# Altium PCB BH1750_VE6070-RS485 copy.pcbdoc
Units mil, origin at the board's own origin, x right, y up, seen from the top; angles counter-clockwise.
Board outline 4205 x 3775 mil, 2 copper layers (Top Layer, Bottom Layer); 44 components, 46 nets, 133 pads, 69 vias.
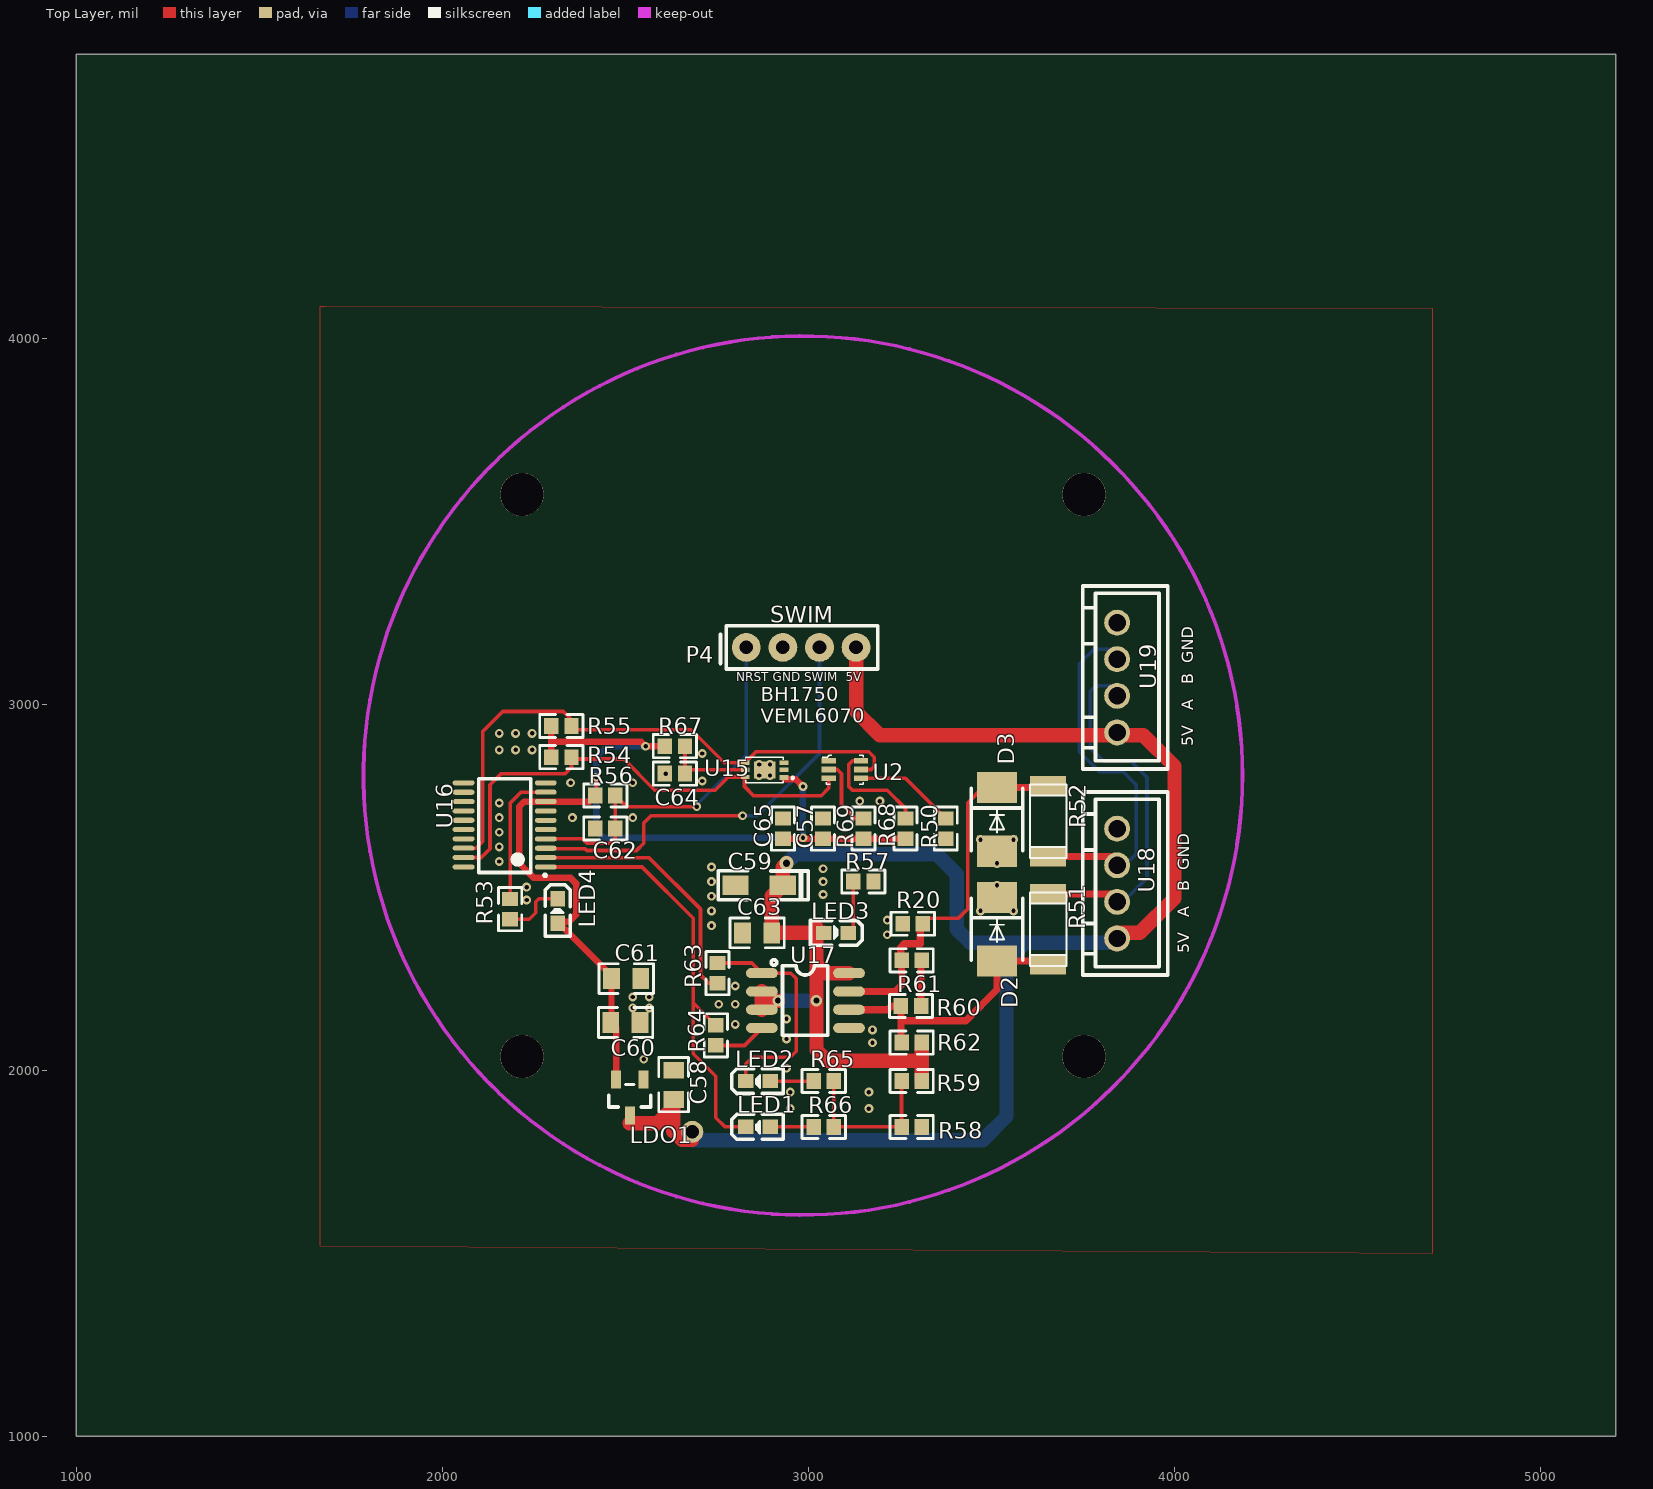
[diagram p0: Top Layer view]
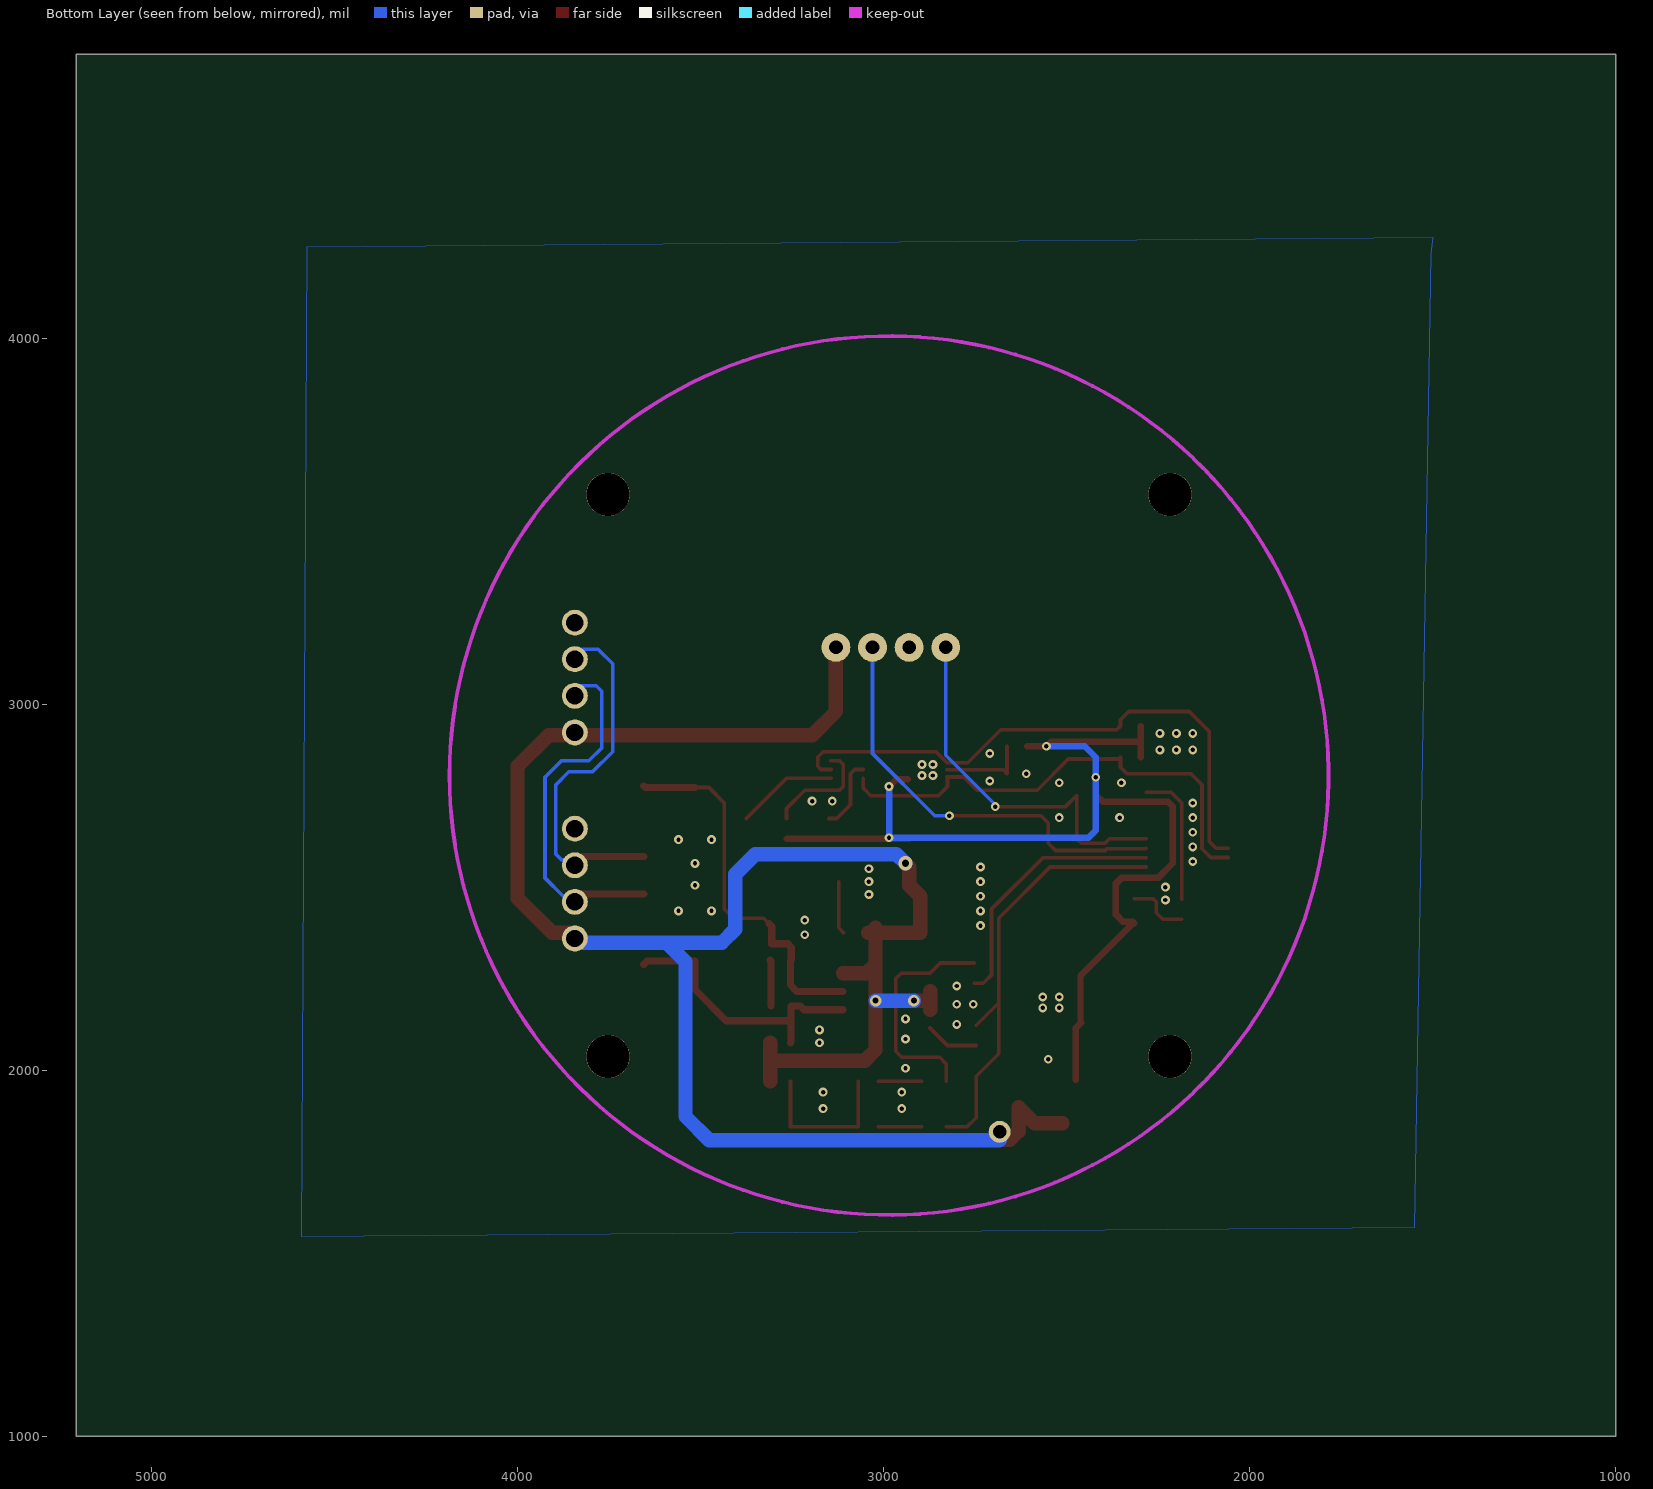
[diagram p1: Bottom Layer view, seen from below]

## Layer stack, top to bottom
Top Layer: signal copper (thickness not stored)
Dielectric: dielectric 12.6, FR-4, Dk 4.8
Bottom Layer: signal copper (thickness not stored)

## Board outline
5205,1000 1000,1000 1000,4775 5205,4775

## Components (designator, comment, footprint, x,y, rotation, side; value= is the part's Value field where it differs from the comment)
C57 "0.1uF" 0603 3040,2660 r90 top
C58 "100nF" 0805 2631.84,1960.1 r270 top
C59 "10uF" CASE-A_3216 2865,2505 r0 top
C60 "1uF" 0805 2500,2130 r180 top
C61 "100nF" 0805 2501.84,2250.1 r180 top
C62 "100nF" 0603 2445,2660 r0 top
C63 "1uF" 0805 2860,2375 r0 top
C64 "0.1uF" 0603 2635,2810 r180 top
C65 "10uF" 0603 2930,2660 r90 top
D2 "SMBJ6.8CA" SMB(DO-214AA) 3515,2385 r90 top
D3 "SMBJ6.8CA" SMB(DO-214AA) 3515,2685 r90 top
LDO1 "SC662K-3.3V" SOT-23(SOT-23-3) 2511.84,1925.1 r180 top
LED1 "KT-0603R" LED-0603 2861.84,1845.1 r0 top
LED2 "19-217/BHC-ZL1M2RY/3T" LED-0603 2861.84,1970.1 r0 top
LED3 "19-217/GHC-YR1S2/3T" LED-0603 3075,2375 r180 top
LED4 "19-213/Y2C-CQ2R2L/3T(CY)" LED-0603 2315,2435 r270 top
P4 "2.54mm/4p" "4P 2.54" 3130,3155 r180 top
R20 "4.7K" 0603 3285,2400 r0 top
R50 "270K" 0603 3375,2660 r270 top
R51 "10" 2010 3655,2385 r270 top
R52 "10" 2010 3655,2680 r90 top
R53 "1K" 0603 2185,2440 r270 top
R54 "4.7K" 0603 2325,2855 r180 top
R55 "4.7K" 0603 2325,2940 r180 top
R56 "1K" 0603 2445,2750 r180 top
R57 "1K" 0603 3150,2515 r180 top
R58 "2K" 0603 3281.84,1845.1 r0 top
R59 "470" 0603 3281.84,1970.1 r0 top
R60 "120" 0603 3280,2175 r180 top
R61 "NC" 0603 3281.84,2300.1 r180 top
R62 "4.7K" 0603 3281.84,2075.1 r180 top
R63 "22" 0603 2751.84,2265.1 r90 top
R64 "22" 0603 2746.84,2095.1 r270 top
R65 "4.7K" 0603 3041.84,1970.1 r180 top
R66 "4.7K" 0603 3041.84,1845.1 r180 top
R67 "1K" 0603 2635,2885 r0 top
R68 "10r" 0603 3265,2660 r270 top
R69 "10K" 0603 3150,2660 r270 top
U2 "VEML6070" 6SMD_MODULE 3055,2845 r0 top
U15 "BH1750FVI-TR" WSOF6I-7_L1.8-W2.6-H0.75-PITCH0.5-(EP)-BL 2880,2820 r90 top
U16 "STM8L051F3_JX" TSSOP-20_JX 2170,2670 r90 top
U17 "MAX13487EESA" SOIC-8_150MIL 2991.84,2190.1 r0 top
U18 "A2501WV-04P2" A2501WV-4P 3843.27,2509.72 r270 top
U19 "A2501WV-04P2" A2501WV-4P 3843.27,3072.72 r270 top

## Footprints (in the part's own frame and the unit in brackets; to place one, negate y for a bottom-side part, rotate by r counter-clockwise, add the part's x,y. Pads: shape width x height; smd on the part's side, far side on the other; paste and mask are expansions set on the pad)
"4P 2.54" [mm]
  round 2 hole 0.95: 1(0,0) 2(2.54,0) 3(5.08,0) 4(7.62,0)
  silkscreen extent -1.5,-1.5 9,1.5
6SMD_MODULE [mm]
  rect 1x0.4 smd: 1(0,0) 2(0,-0.6) 3(0,-1.2) 4(2.25,-1.2) 5(2.25,-0.6) 6(2.25,0)
  silkscreen extent -0.44,-1.62 2.42,0.4
0603 [mm]
  rect 1x1.1 smd: 1(-0.7,0) 2(0.7,0)
  silkscreen extent -1.5,-0.8 1.5,0.8
0805 [mm]
  rect 1.16x1.45 smd: 1(-1.016,0) 2(1.016,0)
  silkscreen extent -1.9,-1.03 1.87,1.04
2010 [mil]
  rect 55.1x98.4 smd: 1(-96.5,0) 2(96.5,0)
  silkscreen extent -100,-50 100,50
A2501WV-4P [mm]
  round 1.8 hole 1.2: 1(3.809,0.001) 2(1.269,0.001) 3(-1.271,0.001) 4(-3.809,-0.001)
  silkscreen extent -6.35,-2.38 6.35,3.5
CASE-A_3216 [mil]
  rect 71.5x53.5 smd: 1(64.5,0) 2(-64.5,0)
  silkscreen extent -112,-39 134,40
LED-0603 [mil]
  rect 43x39 smd: 1(33.5,0) 2(-33.5,0)
  silkscreen extent -72,-34 70,34
SMB(DO-214AA) [mil]
  rect 85x108 smd: 1(-87,0) 2(87,0)
  silkscreen extent -85,-70 85,70
SOIC-8_150MIL [mm]
  oval 2.2x0.7 smd: 1(-3.023,1.905) 2(-3.023,0.635) 3(-3.023,-0.635) 4(-3.023,-1.905) 5(3.023,-1.905) 6(3.023,-0.635) 7(3.023,0.635) 8(3.023,1.905)
  silkscreen extent -2.37,-2.41 1.55,2.83
SOT-23(SOT-23-3) [mm]
  rect 0.7x1.25 smd: 1(-0.95,-1.25) 2(0.95,-1.25) 3(0,1.25)
  silkscreen extent -1.46,-0.9 1.46,0.65
TSSOP-20_JX [mm]
  oval 0.35x1.52 smd: 1(-2.921,-2.85) 2(-2.271,-2.85) 3(-1.621,-2.85) 4(-0.97,-2.85) 5(-0.32,-2.85) 6(0.32,-2.85) 7(0.97,-2.85) 8(1.621,-2.85) 9(2.271,-2.85) 10(2.921,-2.85) 11(2.921,2.85) 12(2.268,2.85) 13(1.621,2.85) 14(0.97,2.85) 15(0.323,2.85) 16(-0.318,2.85) 17(-0.968,2.85) 18(-1.615,2.85) 19(-2.266,2.85) 20(-2.921,2.85)
  silkscreen extent -3.6,-2.9 3.2,1.8
WSOF6I-7_L1.8-W2.6-H0.75-PITCH0.5-(EP)-BL [mm]
  rect 0.351x0.599 smd: 1(-0.511,-1.35)
  rect 0.3x0.6 smd: 2(0.01,-1.35) 3(0.511,-1.35)
  rect 0.3x0.599 smd: 4(0.51,1.35) 5(0.01,1.35) 6(-0.49,1.35)
  rect 1.2x1.5 smd: 7(0,0)
  silkscreen extent -0.9,-1.99 0.9,1.3

## Free pads (board coordinates)
  round 60 hole 36: 1(2682.62,1831.6)
  round 118.11 hole 118.11 unplated: ""(2217.28,2037.28) ""(2217.28,3572.72) ""(3752.72,2037.28) ""(3752.72,3572.72)

## Via types
v1: diameter 24.09, hole 12.01, Top Layer to Bottom Layer, 60 vias
v2: diameter 24, hole 12, Top Layer to Bottom Layer, 6 vias
v3: diameter 31.5, hole 15.75, Top Layer to Bottom Layer, 2 vias
v4: diameter 39.37, hole 19.69, Top Layer to Bottom Layer, 1 vias

## Nets (pads, with @x,y where several pads share a name; then routed paths per layer and width w, separated by ;. In a path a pad name is that pad's centre, name@x,y a point inside that pad or via, vN(x,y) a via of type N, cw(c..) or ccw(c..) an arc to the next point about the centre after c; other vN are vias at no path point)
3.3V: C57.1 C60.2 C61.2 C65.1 LDO1.2 LED4.1 R54.2 R55.2 R56.2 R67.1 R68.2 R69.2 U15.1 U16.8 | length 3131.2
  Top Layer w10: R56.2 2420,2752.56 v2(2420,2800)
  Top Layer w17.72: R54.2 R55.2 ; 2297.44,2897.4 2542.6,2897.4 v2(2555,2885) R67.1 ; R56.2 2401.25,2733.8 U16.8 2223.8,2733.8 2210,2720 2210,2565 2250,2525 2350,2525 2365,2510 2365,2425 2345,2405 2318.51,2405 LED4.1 2318.5,2401.5 2461.84,2258.16 2461.84,2220.09 ; C61.2 2461.84,2131.84 C60.2 2474.44,2115.56 LDO1.2 ; C65.1 R68.2 ; U15.1@2933.16,2795 2965,2795 v2(2985,2775)
  Bottom Layer w17.72: v2(2555,2885) 2450,2885 2420,2855 v2(2420,2800) 2420,2655 2440,2635 v2(2985,2635) v2(2985,2775)
+5V: C58.2 C59.1 C63.2 LDO1.3 LED3.1 P4.1 pad.1 R59.2 R62.1 U17.2 U17.3 U17.8 U18.1 U19.1 | length 5952.8
  Top Layer w10: U19.1 3851.06,2915 3915,2915
  Top Layer w39.37: LDO1.3@2511.05,1854.4 2586.85,1854.4 2631.05,1898.6 2631.05,1833.6 2654.55,1810.1 pad.1@2681.85,1810.1 ; U17.3 U17.2 ; 2872.84,2190.16 2872.9,2190.1 v3(2916.84,2190.1) ; v4(2940,2565) 2929.5,2554.5 C59.1 2900.01,2475.51 C63.2 LED3.1 ; LED3.1@3021.8,2388.9 3021.8,2290.1 3046.8,2265.1 U17.8 ; 3021.84,2300.1 v3(3021.84,2190.1) 3021.84,2055.1 3050.83,2026.1 3309.43,2026.1 ; P4.1 3130,2980 3195,2915 3885.7,2915 ; R59.2 R62.1 ; U19.1@3838.6,2925 3838.6,2915 3915,2915 4000,2830 4000,2470 3905,2375 U18.1@3840,2375
  Bottom Layer w39.37: pad.1@2681.8,1810.1 2683.3,1808.6 3476,1808.6 3541,1873.6 3541,2296 3593.6,2348.6 ; v3(2916.84,2190.1) v3(3021.84,2190.1) ; v4(2940,2565) 2965,2590 3245,2590 3350,2590 3405,2535 3405,2385 3441.4,2348.6 3593.6,2348.6 ; U18.1@3853.9,2348.6 3593.6,2348.6
GND: C57.2 C58.1 C59.2 C60.1 C61.1 C62.1 C63.1 C64.2 C65.2 D2.2 D3.1 LDO1.1 P4.3 R20.1 R50.2 R57.1 R58.2 U2.1 U15.2 U15.3 U15.7 U16.7 U17.5 U18.4 U19.4
  other v1: 2950,1895 3165,1895 2950,1940 3165,1940 2940,2005 2550,2030 3175,2075 2940,2085 3175,2110 2800,2125 2940,2140 2520,2170 2565,2170 2755,2180 2800,2180 2520,2200 2565,2200 2800,2230 3215,2370 2735,2395 3215,2410 2735,2435 3470,2435 3560,2435 2230,2465 2735,2475 3040,2480 2230,2500 3515,2505 2735,2515 3040,2515 3040,2550 2735,2555 3515,2565 2155,2570 2155,2610 3470,2630 3560,2630 2155,2650 2155,2690 2355,2690 2520,2690 2155,2730 3140,2735 3195,2735 2350,2785 2520,2785 2710,2790 2865,2805 2895,2805 2610,2810 2865,2835 2895,2835 2710,2865 2155,2875 2200,2875 2245,2875 2155,2920 2200,2920 2245,2920
NRST: C62.2 P4.4 R56.1 U16.4 | length 1044.4
  Top Layer w10: U16.4 2383.2,2631.8 2395,2620 2460,2620 2470,2630 2472.55,2632.55 C62.2 R56.1 ; R56.1 2502.6,2720 v2@2695.8,2720
  Bottom Layer w10: v2(2695,2720) 2695,2725 2830.01,2860.01 P4.4
OSC_IN: U16.5
OSC_OUT: U16.6
PB0: U16.10
PB1: U16.11
PB2: U16.12
PB3: U16.13
PC4: U16.20
PD0: R53.1 U16.9 | length 371.8
  Top Layer w10: R53.1 2185,2510 2185,2730 2214.4,2759.4 U16.9
R7_2: LED4.2 R53.2 | length 170.8
  Top Layer w10: R53.2 2237.44,2412.44 2240,2415 2255,2430 2255,2460 2263.5,2468.5 LED4.2
R9_1: R60.1 R61.1 | length 125.9
  Top Layer w19.68: R60.1 3307.57,2298.28 R61.1
R13_1: R58.1 R59.1 R65.1 R66.1 | length 434.9
  Top Layer w10: R65.1 R66.1 R58.1 R59.1
R13_2: LED2.1 R65.2 | length 118.9
  Top Layer w10: LED2.1 R65.2
R14_2: LED1.1 R66.2 | length 118.9
  Top Layer w10: LED1.1 R66.2
R17_2: LED3.2 R57.2 | length 145.8
  Top Layer w10: LED3.2 3122.45,2388.94 R57.2@3122.45,2515
R19_1: R51.1 U18.2 U19.2 | length 972.8
  Top Layer w19.68: R51.1 3833.58,2481.5 U18.2@3840.04,2475.04
  Bottom Layer w10: U19.2@3825,3050 3785,3050 3770,3035 3770,2880 3805,2845 3880,2845 3925,2800 3925,2525 3875,2475 U18.2@3840,2475
R21_1: R52.1 U18.3 U19.3 | length 973.6
  Top Layer w19.68: R52.1 3831.58,2583.5 U18.3@3840.04,2575.04
  Bottom Layer w10: U19.3@3825.04,3150.04 3780.04,3150.04 3740,3110 3740,2870 3795,2815 3860,2815 3895,2780 3895,2590 3880.04,2575.04 U18.3@3840.04,2575.04
S$18: 
S$20: 
S$24: 
S$26: 
S$28: 
S$30: 
S$67: 
S$69: 
S$714: 
SCL: R54.1 U2.3 U15.6 U16.19 | length 1356.1
  Top Layer w10: U16.19 2105.8,2580.8 2125,2600 2130,2605 2130,2780 2160,2810 2310,2810 2335,2810 2352.56,2827.56 R54.1 ; R54.1 2357.6,2850 2495,2850 2580,2765 2745,2765 2780.7,2800.7 U15.6 ; U15.6 2825,2798.86 2825,2775 2850,2750 3035,2750 3055.01,2770.01 U2.3
SDA: R55.1 U2.5 U15.4 U16.18 | length 1604.5
  Top Layer w10: U16.18 2091.4,2606.4 2110,2625 2110,2925 2165,2980 2330,2980 2352.6,2957.4 R55.1 ; R55.1 2362.57,2930 2680,2930 2769.92,2840.08 U15.4 2856.76,2870 3130,2870 3165,2870 3180,2855 3180,2830 3171.38,2821.38 U2.5
SPI1_MISO: U16.17
SPI1_MOSI: U16.16
SPI1_NSS: U16.14
SPI_SCK: U16.15
SWIM: P4.2 U16.3 | length 1182.4
  Top Layer w10: U16.3 2283.4,2605 2389.3,2605 2394.3,2600 2530,2600 2550,2620 2550,2675 2570,2695 v2(2820,2695)
  Bottom Layer w10: v2(2820,2695) 2860,2695 3030,2865 P4.2
U1_5: C64.1 R67.2 U15.5 | length 243.6
  Top Layer w10: R67.2 C64.1 2672.95,2820.4 U15.5
U2_2: R69.1 U2.2 | length 200.2
  Top Layer w10: U2.2 3078.62,2821.38 3085,2815 3090,2810 3090,2725 3127.44,2687.56 R69.1
U2_4: R50.1 U2.4 | length 277.1
  Top Layer w10: U2.4 3264.8,2797.76 R50.1
U2_6: R68.1 U2.6 | length 305
  Top Layer w10: U2.6 3120,2845 3110,2835 3110,2775 3120,2765 3215,2765 3265,2715 R68.1
U4_1: LED2.2 R63.2 U17.1 | length 630.5
  Top Layer w10: R63.2 2845.28,2292.66 U17.1 ; LED2.2 2828.3,2016.6 2846.7,2035 2950,2035 2966.8,2051.8 2966.8,2250.1 2951.8,2265.1 U17.1
U4_4: R64.2 U17.4 | length 145.7
  Top Layer w10: R64.2 2825.28,2067.54 U17.4
U4_6: D2.1 R51.2 R60.2 R62.2 U17.6 | length 765.3
  Top Layer w19.68: U17.6 3216.84,2165.1 3226.74,2175 R60.2 3252.45,2076.93 R62.2 ; 3254.3,2132.3 3257.1,2135.1 3430.1,2135.1 3515.01,2220.01 D2.1 3645.51,2298 R51.2
U4_7: D3.2 R20.2 R52.2 R61.2 U17.7 | length 1037.9
  Top Layer w10: R20.2 3327.55,2415 3410,2415 3435,2440 3435,2675 3435,2730 3477,2772 D3.2
  Top Layer w19.68: U17.7 3211.84,2215.1 3236.84,2215.1 3254.28,2232.54 R61.2 ; R61.2@3254.2,2300.1 3251.8,2302.5 3251.8,2335.1 3261.8,2345.1 3305.1,2345.1 3305.1,2392.55 R20.2 ; D3.2 3650.51,2772 R52.2
USART_RX: R63.1 U16.2 | length 717.2
  Top Layer w10: U16.2 2564.4,2580.6 2705,2440 2705,2260 2725,2240 2727.46,2237.54 R63.1
USART_TX: LED1.2 R64.1 U16.1 | length 1235.4
  Top Layer w10: U16.1 2406.85,2555 ; 2398.76,2555 2545,2555 2685,2415 2685,2184.49 R64.1 ; 2685,2116.49 2685,2195.07 ; 2685,2122.7 2685,2045 2746.8,1983.2 2746.8,1870.1 2771.8,1845.1 LED1.2

## Polygon pours and split planes (outlines as drawn)
GND on Bottom Layer (solid): 1505,4230 1550,1570 4590,1545 4575,4250 1500,4275
GND on Top Layer (solid): 1665,4085 1665,1520 4705,1500 4705,4080 1680,4085

## Keep-outs
Keep-Out Layer:
  circle w10: c2985,2805 r1200.79

## Silkscreen, mask and mechanical layers (free items; w line width, h text height)
Top Overlay:
  lines w11.81 net S$714: 2759.88,3111.37 2759.88,3190.17
  text "SWIM" at 2895,3222.95 h45
  text "NRST GND SWIM  5V" at 2803.17,3063.09 h23.62
  text "BH1750 / VEML6070" at 2870,2948.82 h39.37
  text "5V   A   B  GND" at 4050.75,2885 h31.5 r90
  text "5V   A   B  GND" at 4040.75,2320 h31.5 r90

## Text inside footprints (layer, text, board x,y; h text height)
U2: Document "REF" at 3075.68,2811.54 h19.68